# EAGLE board current_sensor (EAGLE 9.4.2)
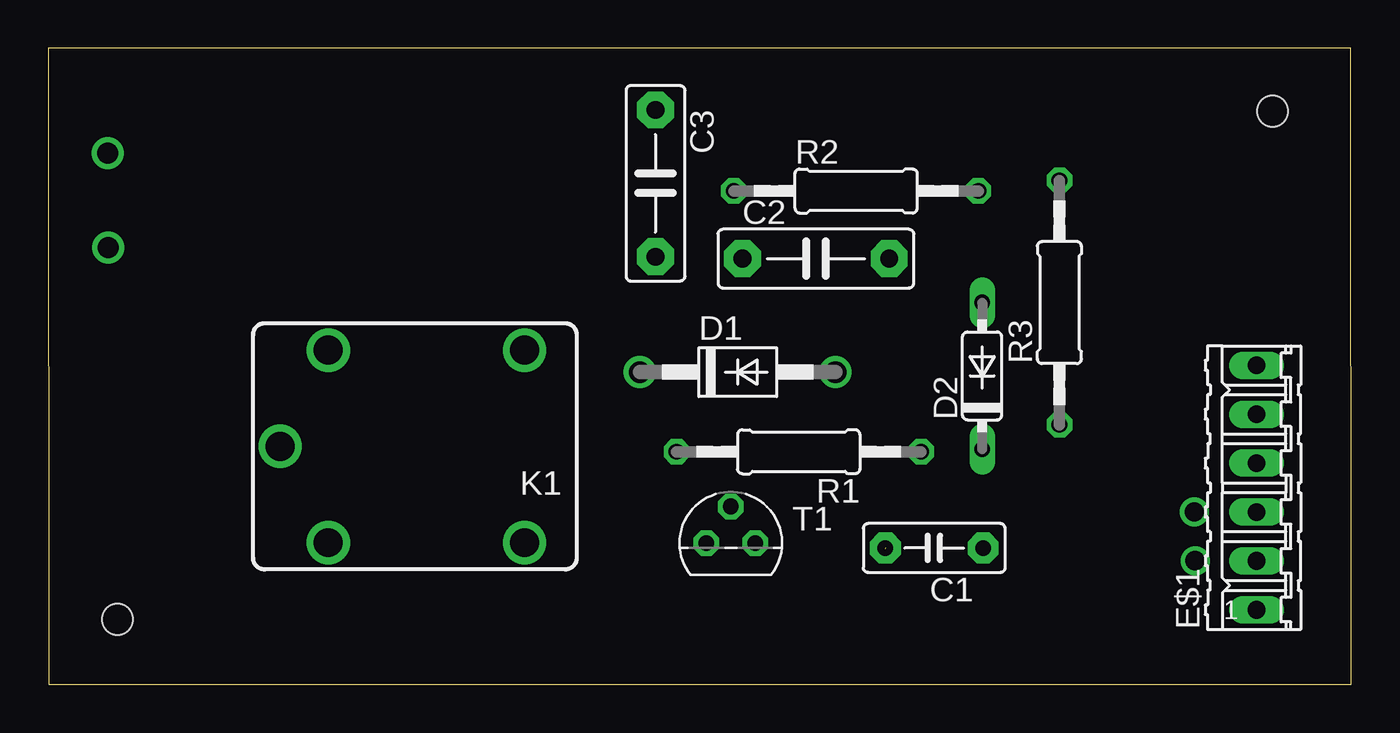
[diagram p0: board, top side]
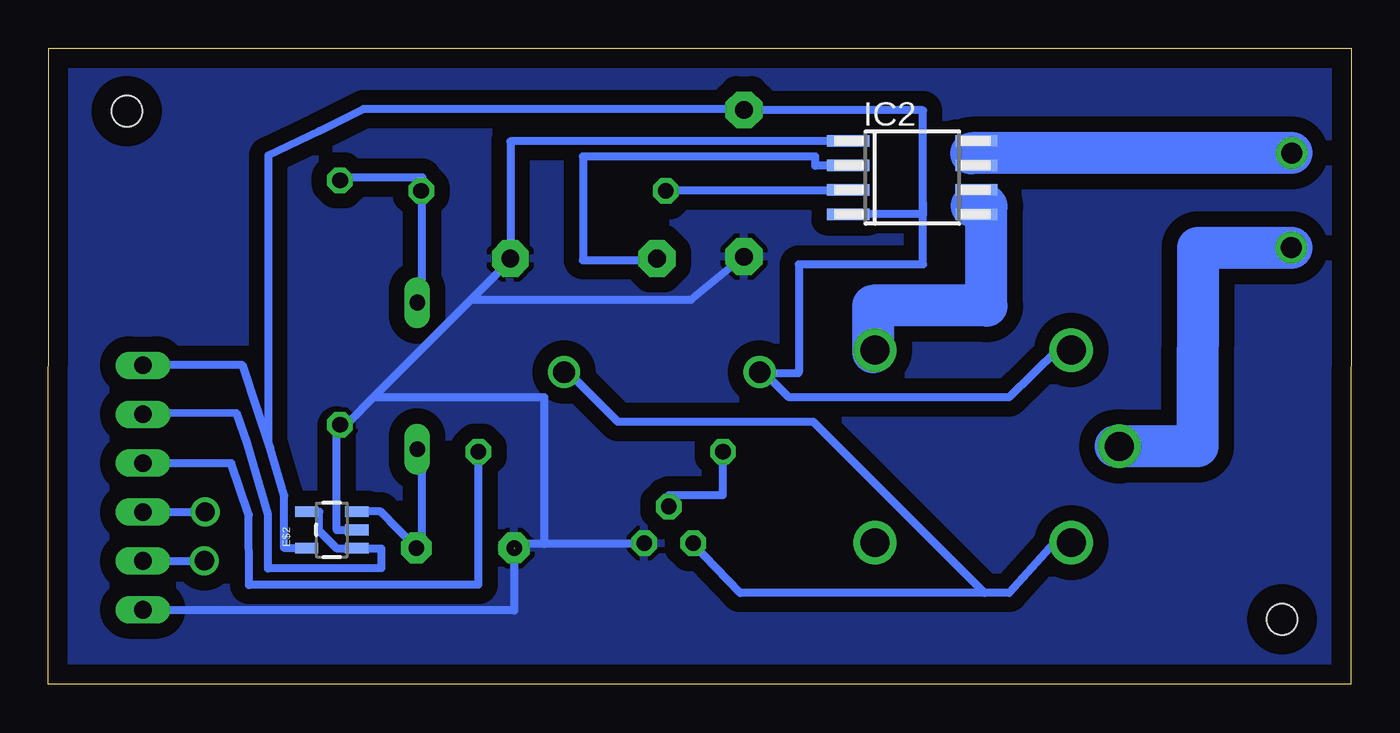
[diagram p1: board, bottom side, seen from below]

Size 67.69 x 33.06 mm. Coordinates in mm from the lower left corner, seen from the top.
Outline: 0.03,0 67.69,0 67.67,33.06 0,33.06 0.03,0
Copper layers (1*16): Top 0.035mm / dielectric 1.5mm / Bottom 0.035mm
Design rules "default": minimum track width 16mil, minimum drill 24mil, track to track 8mil, track to pad 8mil, pad to pad 8mil, via to via 8mil, smd to smd 8mil, copper to edge 40mil, drill to drill 8mil, minimum pad ring 10mil, minimum via ring 8mil, stop-mask expansion 4mil, vias tented up to drill 0mil, thermal gap 10mil
Holes 1.6 mm at 63.6,29.78 3.6,3.38

## Footprints (pad centres in the part's own frame; a part is rotated, then mirrored left to right if it is on the bottom)
C5B2.5 = drill 0.813 pad 1.6 octagon: 1 -2.54,0; 2 2.54,0
C7.5B3 = drill 0.914 pad 1.905 octagon: 1 -3.81,0; 2 3.81,0
DO41-10 = drill 1.118: A 5.08,0; C -5.08,0
DO35-7 = drill 0.813 long: A 3.81,0; C -3.81,0
06P = drill 0.914 long: 1 -6.35,0; 2 -3.81,0; 3 -1.27,0; 4 1.27,0; 5 3.81,0; 6 6.35,0
SOT23-5 = smd 0.55 x 1.2: 1 -0.95,-1.3; 2 0,-1.3; 3 0.95,-1.3; 4 0.95,1.3; 5 -0.95,1.3
SO-08M = smd 0.6 x 2.2: 1 -1.905,-3.33; 2 -0.635,-3.33; 3 0.635,-3.33; 4 1.905,-3.33; 5 1.905,3.33; 6 0.635,3.33; 7 -0.635,3.33; 8 -1.905,3.33
CQ1 = drill 1.5: 1 4.5,-5; 2 4.5,5; C 7,0; NC -5.7,-5; NO -5.7,5
0207/12 = drill 0.813 octagon: 1 -6.35,0; 2 6.35,0
TO92 = drill 0.813 octagon: 1 1.27,0; 2 0,1.905; 3 -1.27,0

## Placement (x,y rotation side)
C1  [C5B2.5]  46.02,7.09 180 top
C2  [C7.5B3]  39.88,22.12 0 top
C3  [C7.5B3]  31.55,26.03 270 top
D1  1N4004  [DO41-10]  35.81,16.23 0 top
D2  1N4148DO35-7  [DO35-7]  48.51,16.03 90 top
E$1  [06P]  62.77,10.23 90 top
E$2  [SOT23-5]  52.95,8.03 90 bottom
IC2  24-AA65SM  [SO-08M]  22.81,26.34 270 bottom
K1  CQ1-12V  [CQ1]  19.05,12.37 180 top
R1  [0207/12]  38.99,12.09 180 top
R2  [0207/12]  41.97,25.64 0 top
R3  [0207/12]  52.53,19.84 90 top
T1  BC547  [TO92]  35.46,7.34 0 top

## Library data of the parts
C1-C3 = capacitor-wima
D1 D2 = diode
E$1 E$2 = SparkFun
IC2 = microchip; MF: MICROCHIP; MPN: 24AA65/SM; OC_FARNELL: 1331307; OC_NEWARK: 92C6926
K1 = relay; OC_FARNELL: unknown; OC_NEWARK: unknown
R1-R3 = rcl
T1 = transistor

## Nets
GND: C1.2 C2.2 C3.2 R3.1 T1.1
N$1: D1.A K1.2
N$3: R1.2 T1.2
N$4: D2.A R3.2
N$5: C1.1 D2.C
S$2: D1.C K1.1
S$6: C3.1
S$23: IC2.7
VCC: IC2.2

## Tracks (layer width: path | path; a pad name or v marks a point on that pad's centre or on a via)
+5V
  Bottom 0.406: 56.26,12.65 56.26,27.48 53.59,28.75 51.31,29.89 31.62,29.89
GND  (1 unrouted)
  Bottom 0.406: C3.2 31.41,22.37 34.29,19.99 45.72,19.99 | C2.2 43.18,22.53 45.72,19.99 | R3.1 52.07,13.64 50.8,14.91 | 50.8,14.91 45.72,19.99 | 50.8,14.91 41.91,14.91 41.91,7.29 | C1.2 43.18,7.29 41.91,7.29 | 41.91,7.29 36.83,7.29 T1.1 | 43.47,7.03 43.47,3.84 62.98,3.84
  pour Bottom (isolate 0.8): 0,33.08 67.8,33.08 67.8,0.08 0,0.08
N$1
  Bottom 0.406: D1.A 40.64,16.18 38.1,13.64 27.94,13.64 19.05,4.75 | 34.22,7.32 31.75,4.75 19.05,4.75 | 19.05,4.75 17.78,4.75 15.43,7.38 K1.2
N$3
  Bottom 0.406: R1.2 32.64,9.83 35.45,9.83 T1.2
N$4
  Bottom 0.406: R3.2 52.07,26.34 48.26,26.34 48.26,19.99 D2.A
N$5
  Bottom 0.406: D2.C 48.26,11.1 48.26,7.29 C1.1
N$7  (via drill 1.1 pad 1.42)
  Bottom 2.184: v3.1,27.61 19.74,27.6
N$8
  Bottom 2.184: 24.84,17.25 24.84,19.68 18.95,19.68 18.95,24.83
N$10  (via drill 1.1 pad 1.42)
  Bottom 2.184: 12.24,12.37 7.98,12.37 7.96,22.69 v3.11,22.69
S$1
  Bottom 0.406: 45.21,11.99 45.34,11.99 45.34,5.18 57.26,5.17
S$2
  Bottom 0.406: 30.48,16.18 28.73,16.18 | 30.48,16.18 D1.C | 30.48,16.18 29.21,14.91 17.78,14.91 15.28,17.37 K1.1
S$3
  Bottom 0.406: 52.01,8.99 50.41,8.99 48.57,7.08
S$4
  Bottom 0.406: 51.27,8.04 52.7,8.03 52.7,13.46
S$5
  Bottom 0.406: 53.88,7.1 55.44,7.1 55.44,9.8
S$6
  Bottom 0.406: 31.75,29.89 C3.1 22.25,29.83 22.25,21.82 28.7,21.82 28.7,16.23
S$7
  Bottom 0.406: 56.27,8.23 56.27,6.03 50.38,6.03 50.38,7.05 52.68,7.05 53.61,7.98 53.61,8.97
S$8  (via drill 1)
  other vias: 59.53,8.96
S$9  (via drill 1)
  other vias: 59.58,6.43
S$12
  Bottom 0.406: 56.77,14.14 57.59,16.58 62.9,16.58
S$13
  Bottom 0.406: 58.16,11.48 62.79,11.49 62.79,11.5
S$14
  Bottom 0.406: 56.8,14.23 56.15,12.27 55.42,9.81
S$16
  Bottom 0.406: 62.95,14.09 57.91,14.1 57.34,12.48 56.27,8.85 56.27,6.87
S$17
  Bottom 0.406: 57.26,5.19 57.27,8.82 58.17,11.48
S$18
  Bottom 0.406: 59.2,8.95 63.09,8.95
S$19
  Bottom 0.406: 59.19,6.4 62.93,6.4
S$22
  Bottom 2.184: 19.02,24.9 19.73,24.87
S$24
  Bottom 0.406: 25.27,25.67 35.74,25.67
S$26
  Bottom 0.406: 25.23,28.22 43.68,28.22 43.68,22.1
S$27
  Bottom 0.406: 27.02,24.42 22.25,24.42 22.25,24.99
S$29
  Bottom 0.406: 25.35,26.94 27.84,26.94 27.84,27.42 39.91,27.42 39.91,22.04 36.05,22.04 36.05,22.05